# EAGLE board TA02 (EAGLE 9.7.0)

Size 125.77 x 89.28 mm. Coordinates in mm from the lower left corner, seen from the top.
Outline: 0,0 125.77,0 125.77,89.28 0,89.28 0,0
Copper layers (1*16): Top 0.035mm / dielectric 1.5mm / Bottom 0.035mm
Design rules "default": minimum track width 6mil, minimum drill 0.35mm, track to track 6mil, track to pad 6mil, pad to pad 6mil, via to via 6mil, smd to smd 6mil, copper to edge 40mil, drill to drill 6mil, minimum pad ring 10mil, minimum via ring 8mil, stop-mask expansion 4mil, vias tented up to drill 0mil, thermal gap 10mil

## Footprints (pad centres in the part's own frame; a part is rotated, then mirrored left to right if it is on the bottom)
LED-RGB-5MM = drill 0.9: B 0.635,0.635; C -0.635,-0.635; G 1.905,-0.635; R -1.905,0.635
RESAD1016W63L850D250B = drill 0.83 pad 1.43: 1 -5.08,0; 2 5.08,0
GL5528 = drill 0.8 pad 1.4: 1 -1.702,0; 2 1.702,0
ARDUINO-UNO-R3-SHIELD = drill 1.016 pad 1.88: 3.3V 24.13,-2.54; 5V 24.13,0; A0 24.13,12.7; A1 24.13,15.24; A2 24.13,17.78; A3 24.13,20.32; A4 24.13,22.86; A5 24.13,25.4; AREF -24.13,-13.97; D2 -24.13,20.32; D3 -24.13,17.78; D4 -24.13,15.24; D5 -24.13,12.7; D6 -24.13,10.16; D7 -24.13,7.62; D8 -24.13,3.81; D9 -24.13,1.27; D10 -24.13,-1.27; D11 -24.13,-3.81; D12 -24.13,-6.35; D13 -24.13,-8.89; GND@0 24.13,2.54; GND@1 24.13,5.08; GND@2 -24.13,-11.43; IOREF 24.13,-7.62; NC 24.13,-10.16; RES 24.13,-5.08; RX -24.13,25.4; SCL -24.13,-19.05; SDA -24.13,-16.51; TX -24.13,22.86; VIN 24.13,7.62

## Placement (x,y rotation side)
DLED  LED-RGBRCBG-PTH  [LED-RGB-5MM]  118.28,67.14 270 top
R1  220  [RESAD1016W63L850D250B]  103.04,65.87 0 top
R2  220  [RESAD1016W63L850D250B]  103.04,63.33 0 top
R3  220  [RESAD1016W63L850D250B]  103.04,70.95 0 top
RFR1  PHOTOCELL_GL5528  [GL5528]  104.1,17.99 0 top
RFR2  PHOTOCELL_GL5528  [GL5528]  104.21,12.87 0 top
RFR3  PHOTOCELL_GL5528  [GL5528]  104.19,6.99 0 top
RRR1  100  [RESAD1016W63L850D250B]  87.8,17.61 0 top
RRR2  100  [RESAD1016W63L850D250B]  87.8,12.53 0 top
RRR3  100  [RESAD1016W63L850D250B]  87.8,7.45 0 top
UARDUINO  ARDUINO-UNO-R3-SHIELD  [ARDUINO-UNO-R3-SHIELD]  29.84,41.4 180 top

## Library data of the parts
DLED R1-R3 RFR1-RFR3 RRR1-RRR3 UARDUINO = Tinkercad

## Nets
DLED_B: DLED.B R1.2
DLED_G: DLED.G R2.2
DLED_R: DLED.R R3.2
UARDUINO_5V: RFR1.2 RFR2.2 RFR3.2 UARDUINO.5V
UARDUINO_A0: RFR1.1 RRR1.2 UARDUINO.A0
UARDUINO_A1: RFR2.1 RRR2.2 UARDUINO.A1
UARDUINO_A2: RFR3.1 RRR3.2 UARDUINO.A2
UARDUINO_D9: R2.1 UARDUINO.D9
UARDUINO_D10: R1.1 UARDUINO.D10
UARDUINO_D11: R3.1 UARDUINO.D11
UARDUINO_GND: DLED.C RRR1.1 RRR2.1 RRR3.1 UARDUINO.GND@0 UARDUINO.GND@1 UARDUINO.GND@2

## Tracks (layer width: path | path; a pad name or v marks a point on that pad's centre or on a via)
DLED_B  (1 unrouted)
DLED_G  (1 unrouted)
DLED_R  (1 unrouted)
UARDUINO_5V  (3 unrouted)
UARDUINO_A0  (2 unrouted)
UARDUINO_A1  (2 unrouted)
UARDUINO_A2  (2 unrouted)
UARDUINO_D9  (1 unrouted)
UARDUINO_D10  (1 unrouted)
UARDUINO_D11  (1 unrouted)
UARDUINO_GND  (6 unrouted)